# Altium PCB load-cal-board-1point2in.PcbDoc
Units mm, origin at the board's own origin, x right, y up, seen from the top; angles counter-clockwise.
Board outline 37 x 16 mm, 4 copper layers (Top Layer, Mid-Layer 1, Mid-Layer 2, Bottom Layer), stack 1.105 mm thick; 4 components, 3 nets, 14 pads, 150 vias.
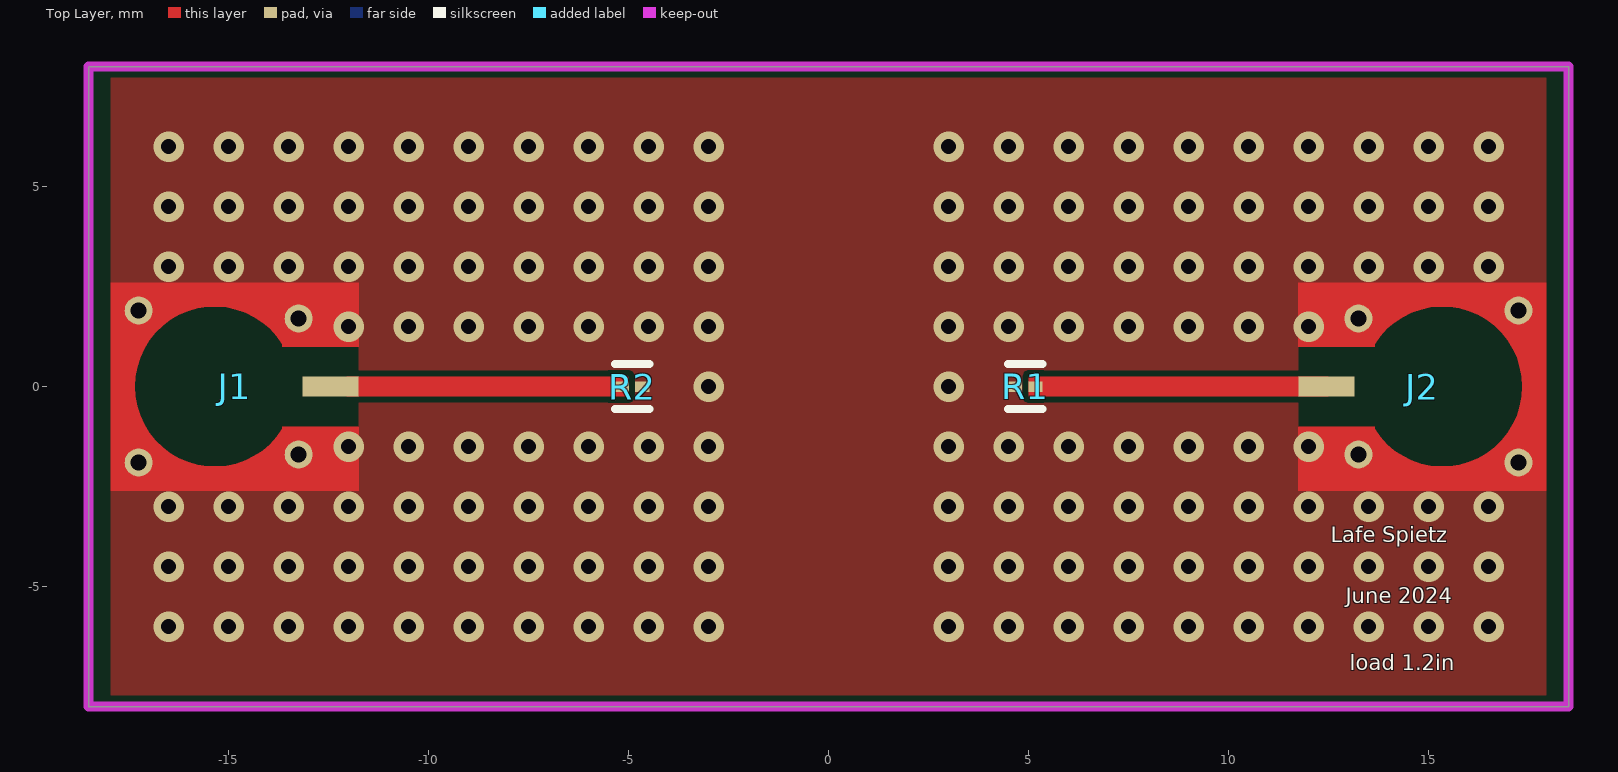
[diagram p0: Top Layer view]
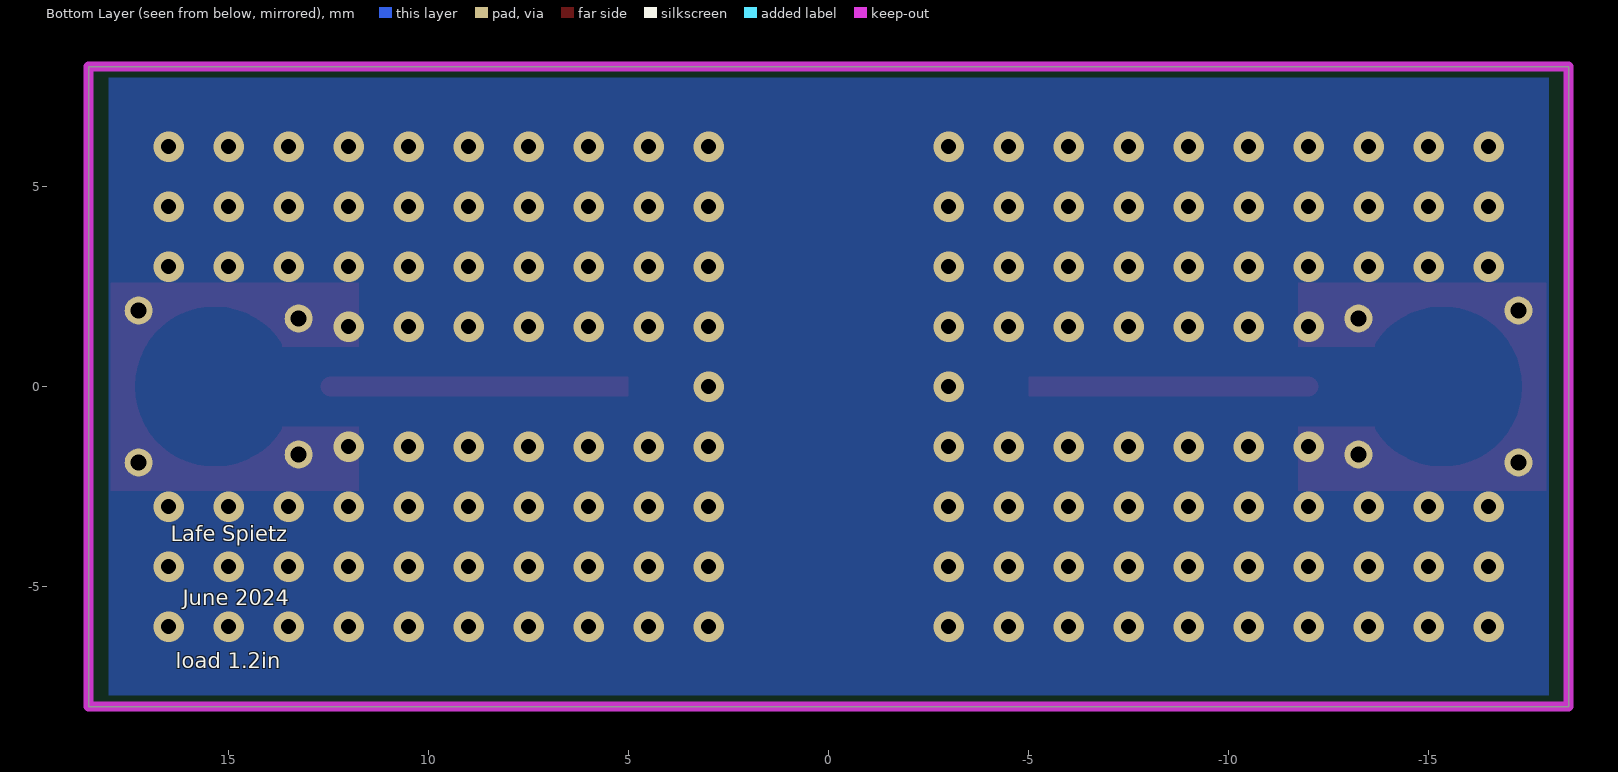
[diagram p1: Bottom Layer view, seen from below]
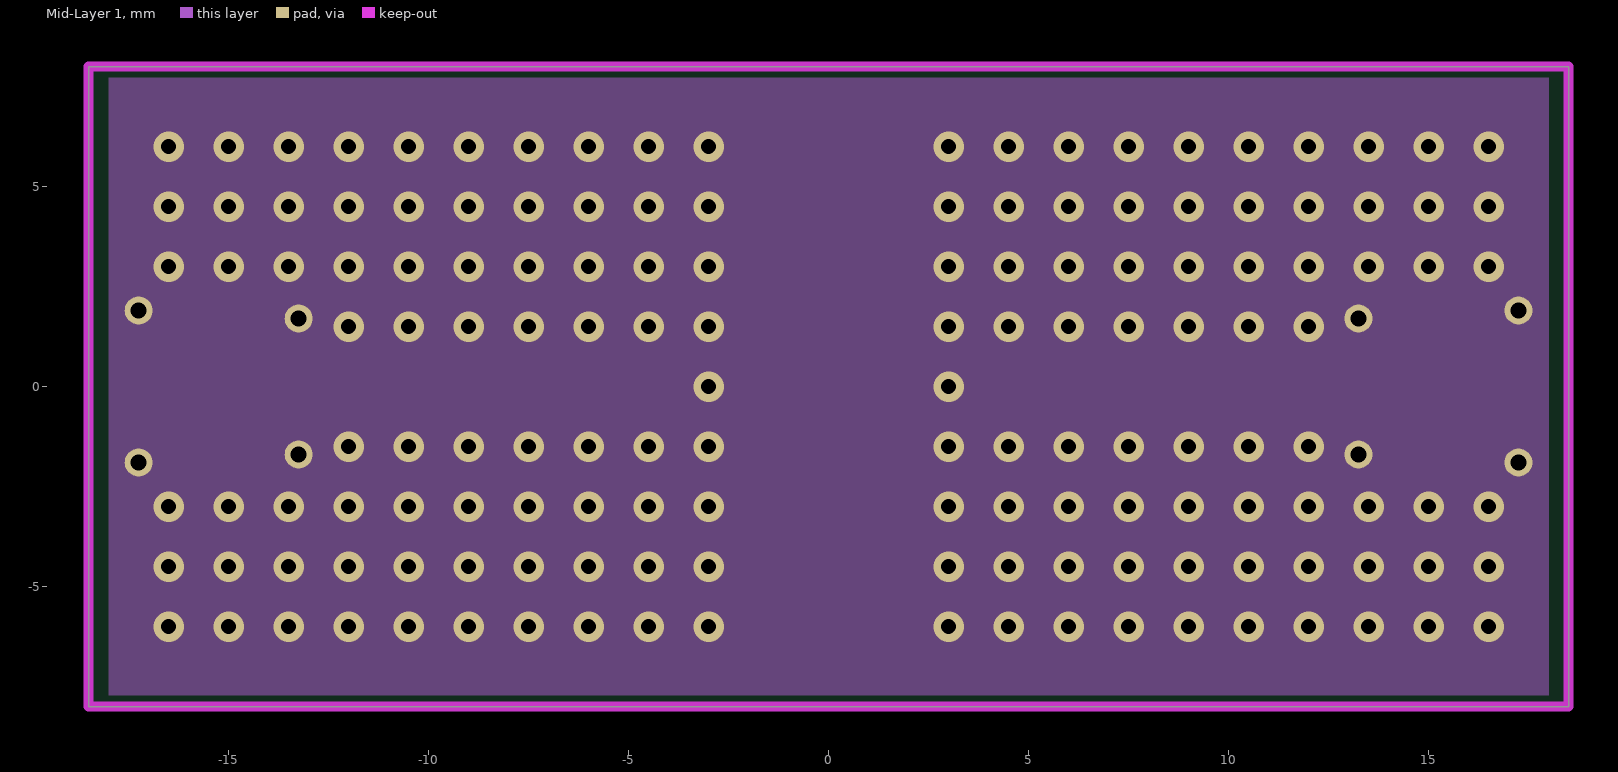
[diagram p2: Mid-Layer 1]
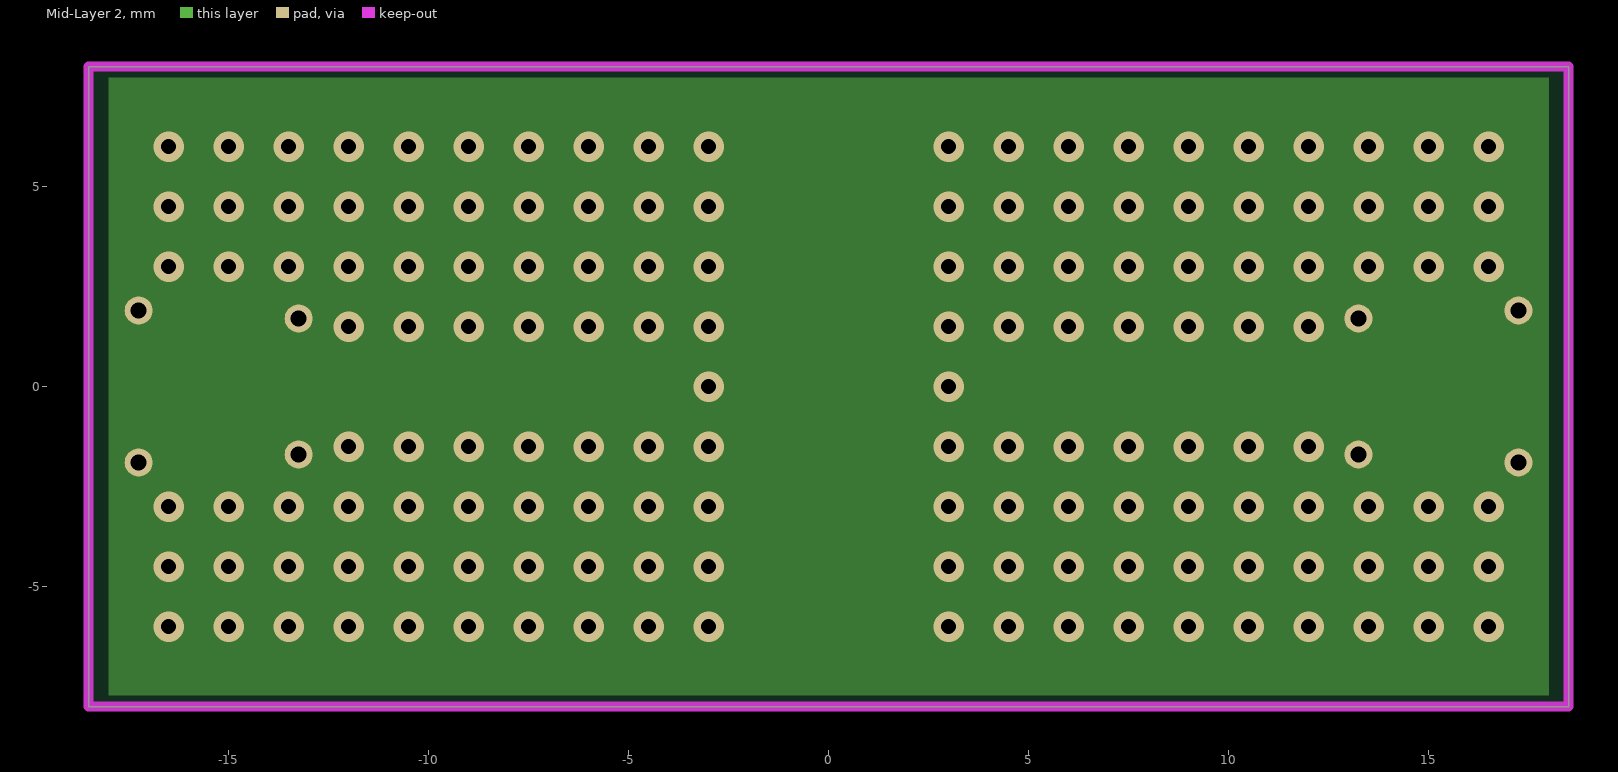
[diagram p3: Mid-Layer 2]
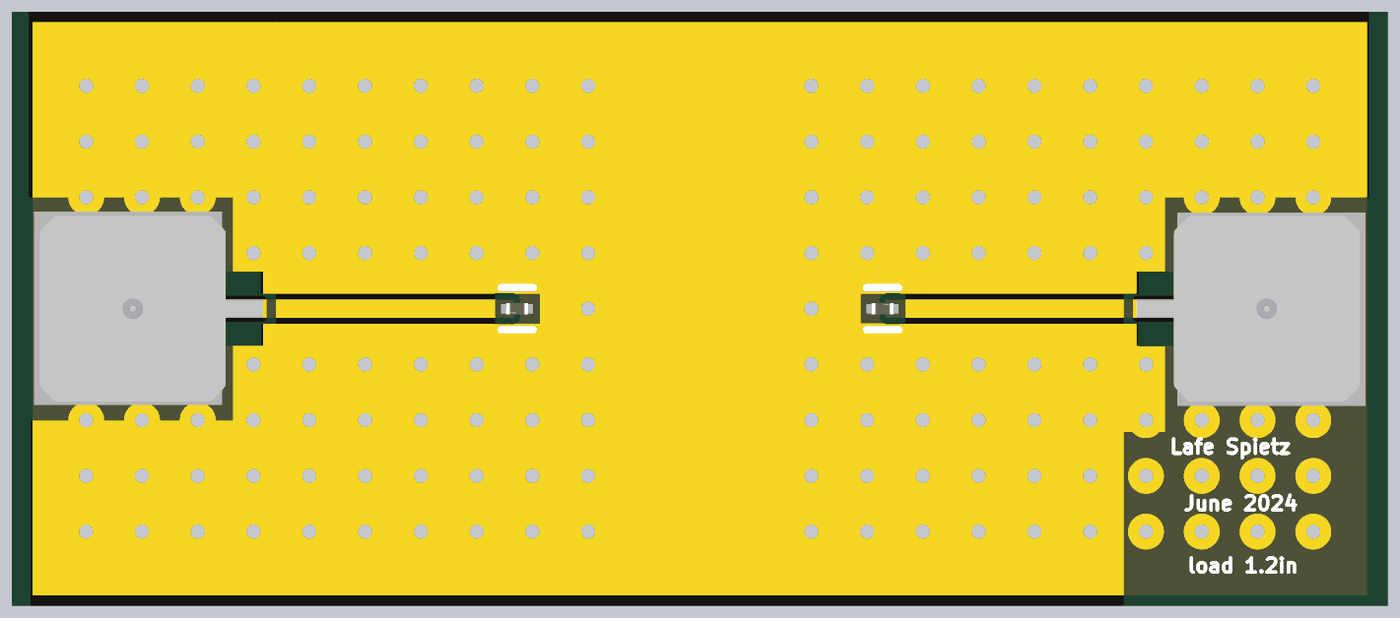
[diagram p4: 3D render of the assembled board from above, using the file's embedded part models]

## Layer stack, top to bottom
Top Solder: solder mask 0.0254, SM-001, Dk 4
Top Layer: signal copper 0.035
Core1: dielectric 0.254, RO4350B, Dk 3.48
Mid-Layer 1: signal copper 0.035
Dielectric 1: prepreg 0.1778, PR7628, Dk 4.24
Dielectric 2: prepreg 0.1016, PR2116, Dk 4.17
Dielectric 3: prepreg 0.1778, PR7628, Dk 4.24
Mid-Layer 2: signal copper 0.035
Core2: dielectric 0.254, RO-4350B, Dk 3.48
Bottom Layer: signal copper 0.035
Bottom Solder: solder mask 0.0254, SM-001, Dk 4

## Board outline
-18.5,-8 -18.5,8 18.5,8 18.5,-8

## Design rules (kind name [scope] priority, off if disabled: settings)
Clearance [All] p1: gap=0.254 ignorepadtopadclearanceinfootprint=FALSE except(0: Track-Fill Track-Region Poly-Poly Poly-Region Poly-Hole; 0.095: SMDPad-Region Region-Region; 0.1: Track-Track Track-SMDPad Via-Poly; 0.152: Arc-Poly Track-Poly SMDPad-Poly THPad-Poly Fill-Poly; 0.203: Arc-SMDPad; 0.229: SMDPad-SMDPad)
PolygonConnect [All] p1: connectstyle=Direct reliefconductorwidth=0.254 reliefentries=4 polygonreliefangle="90 Angle" airgapwidth=0.254
RoutingVias [All] p1: holewidth=0.381 width=0.635 viastyle="Through Hole" minholewidth=0.127 minwidth=0.254 maxholewidth=0.711 maxwidth=1.27
SolderMaskExpansion [All] p1: expansion=0.102 istentingtop=FALSE
Width [All] p1 off: maxlimit=0.55 minlimit=0.1 preferedwidth=0.254 toplayer_prefwidth=0.1 midlayer1_minwidth=0.254 midlayer1_maxwidth=0.254 midlayer2_minwidth=0.254 midlayer2_maxwidth=0.254 bottomlayer_minwidth=0.254 bottomlayer_maxwidth=0.254 minimp=50.000000 maximp=50.000000 favimp=50.000000
Width cpw-Z-1 [All] p2 off: maxlimit=0.5 minlimit=0.174 preferedwidth=0.254 toplayer_minwidth=0.323 toplayer_prefwidth=0.406 impedanceprofiledriven=TRUE impedanceprofileid={FF6547F1-1ACB-4B88-A69B-03F59FE56022} minimp=50.000000 maximp=50.000000 favimp=50.000000
30 further rules are at their usual default settings.

## Components (designator, comment, footprint, x,y, rotation, side; value= is the part's Value field where it differs from the comment)
J1 "SMP-straight-19S141-40ML5" rosenberger-19S141-40ML5 -15.347,0 r90 top
J2 "SMP-straight-19S141-40ML5" rosenberger-19S141-40ML5 15.347,0 r270 top
R1 "ERJ-1GNF1001C" FP-ERJ1GN-IPC_C 4.919,0 r0 top
R2 "ERJ-1GNF1001C" FP-ERJ1GN-IPC_C -4.91,0 r180 top

## Footprints (in the part's own frame and the unit in brackets; to place one, negate y for a bottom-side part, rotate by r counter-clockwise, add the part's x,y. Pads: shape width x height; smd on the part's side, far side on the other; paste and mask are expansions set on the pad)
FP-ERJ1GN-IPC_C [mm]
  rect 0.354x0.263 smd paste+0 mask+0: 1(-0.254,0) 2(0.254,0)
  silkscreen extent -0.43,-0.57 0.43,0.57, body extent -0.53,-0.27 0.53,0.27, height 0.25
rosenberger-19S141-40ML5 [mm]
  rect 0.5x1.4 smd: 1(0,-2.9)
  round 0.7 hole 0.4 mask+0: gnd(-1.9,1.9) gnd(-1.7,-2.1) gnd(1.7,-2.1) gnd(1.9,1.9)
  Top Layer region: -2.6,-3.6 -2.6,2.6 2.6,2.6 2.6,-3.6 1,-3.6 1,-1.696 1.06,-1.696 1.759,-0.951 2,0.042 1.718,1.024 0.988,1.739 0,2 -0.988,1.739 -1.718,1.024 -2,0.042 -1.759,-0.951 -1.06,-1.696 -1.06,-1.696 -1,-1.696 -1,-3.6
  body extent -2.5,-3.6 2.5,2.4, height 4.1

## Part data
J1 J2: "SMP Connector Plug, Male Pin 50Ohm Surface Mount Solder", Package=None, Supplier Part Number 1=476-19S201-40ML5, Availability="In Stock", Check_prices=https://www.snapeda.com/parts/853050232/Molex/view-part/?ref=eda, MF=Molex, MP=853050232, Price=None, Purchase-URL=https://pricing.snapeda.com/search/part/853050232/?ref=eda, SnapEDA_Link=https://www.snapeda.com/parts/853050232/Molex/view-part/?ref=snap, Supplier 1=Mouser
R1 R2: library part CMP-1010-00416-3, "RES SMD 1K OHM 1% 1/20W 0201", Case Code (Imperial)=0201, Case Code (Metric)=0603, Max Operating Temperature=125°C, Max Power Dissipation=50mW, Min Operating Temperature=-55°C, Package Quantity=15000, Resistance=1kR, Resistance Tolerance=1%, Resistor Type="Thick Film", Temperature Coefficient=200ppm/°C, Voltage Rating=25V, Case/Package=0201, Contact Plating=Tin, Features="Automotive AEC-Q200", Height=0.01inch, Lead Free="Lead Free", Length=0.6mm, Mount="Surface Mount", Number of Pins=2, Number of Terminations=2, Packaging="Tape and Reel", Power Rating=50mW, Radiation Hardening=No, RoHS Compliant=Yes, Series=ERJ, Size Code=0201, Termination=SMD/SMT, Tolerance=1%, Voltage Rating (DC)=25V, Weight=6E-06oz, Width=0.012inch

## Via types
v1: diameter 0.762, hole 0.381, Top Layer to Bottom Layer, 150 vias

## Nets (pads, with @x,y where several pads share a name; then routed paths per layer and width w, separated by ;. In a path a pad name is that pad's centre, name@x,y a point inside that pad or via, vN(x,y) a via of type N, cw(c..) or ccw(c..) an arc to the next point about the centre after c; other vN are vias at no path point)
GND: J1.gnd J2.gnd R1.1 R2.1
  other v1: -16.5,-6 -15,-6 -13.5,-6 -12,-6 -10.5,-6 -9,-6 -7.5,-6 -6,-6 -4.5,-6 -3,-6 3,-6 4.5,-6 6,-6 7.5,-6 9,-6 10.5,-6 12,-6 13.5,-6 15,-6 16.5,-6 -16.5,-4.5 -15,-4.5 -13.5,-4.5 -12,-4.5 -10.5,-4.5 -9,-4.5 -7.5,-4.5 -6,-4.5 -4.5,-4.5 -3,-4.5 3,-4.5 4.5,-4.5 6,-4.5 7.5,-4.5 9,-4.5 10.5,-4.5 12,-4.5 13.5,-4.5 15,-4.5 16.5,-4.5 -16.5,-3 -15,-3 -13.5,-3 -12,-3 -10.5,-3 -9,-3 -7.5,-3 -6,-3 -4.5,-3 -3,-3 3,-3 4.5,-3 6,-3 7.5,-3 9,-3 10.5,-3 12,-3 13.5,-3 15,-3 16.5,-3 -12,-1.5 -10.5,-1.5 -9,-1.5 -7.5,-1.5 -6,-1.5 -4.5,-1.5 -3,-1.5 3,-1.5 4.5,-1.5 6,-1.5 7.5,-1.5 9,-1.5 10.5,-1.5 12,-1.5 -3,0 3,0 -12,1.5 -10.5,1.5 -9,1.5 -7.5,1.5 -6,1.5 -4.5,1.5 -3,1.5 3,1.5 4.5,1.5 6,1.5 7.5,1.5 9,1.5 10.5,1.5 12,1.5 -16.5,3 -15,3 -13.5,3 -12,3 -10.5,3 -9,3 -7.5,3 -6,3 -4.5,3 -3,3 3,3 4.5,3 6,3 7.5,3 9,3 10.5,3 12,3 13.5,3 15,3 16.5,3 -16.5,4.5 -15,4.5 -13.5,4.5 -12,4.5 -10.5,4.5 -9,4.5 -7.5,4.5 -6,4.5 -4.5,4.5 -3,4.5 3,4.5 4.5,4.5 6,4.5 7.5,4.5 9,4.5 10.5,4.5 12,4.5 13.5,4.5 15,4.5 16.5,4.5 -16.5,6 -15,6 -13.5,6 -12,6 -10.5,6 -9,6 -7.5,6 -6,6 -4.5,6 -3,6 3,6 4.5,6 6,6 7.5,6 9,6 10.5,6 12,6 13.5,6 15,6 16.5,6
NetJ1_1: J1.1 R2.2 | length 6.5
  Top Layer w0.495: J1.1@-12,0 -5.5,0
NetJ2_1: J2.1 R1.2 | length 7.2
  Top Layer w0.495: R1.2@5.25,0 J2.1

## Polygon pours and split planes (outlines as drawn)
GND on Top Layer "NONET_L02_P-001" (solid, pour order 9): 17.947,8 11.453,8 11.453,2.46 17.947,2.46
GND on Top Layer "NONET_L02_P-001" (solid, pour order 8): 17.947,-2.6 11.747,-2.6 11.747,-8 17.947,-8 17.947,-7.715
GND on Top Layer "NONET_L02_P-001" (solid, pour order 7): -11.299,8 -17.947,8 -17.947,2.6 -11.299,2.6 -11.299,2.635
GND on Top Layer "NONET_L02_P-001" (solid, pour order 6): -11,-2.442 -17.947,-2.442 -17.947,-8 -11,-8 -11,-7.558
GND on Top Layer "GND_L01_P000" (solid, pour order 0): -11.747,-8 6,-8 6,8 -11.747,8
GND on Top Layer "GND_L01_P005" (solid, pour order 5): 5,-8 11.747,-8 11.747,8 5,8
GND on Mid-Layer 1 "GND_L02_P001" (solid, pour order 1): -18,8 18,8 18,-8 -18,-8
GND on Mid-Layer 2 "GND_L03_P002" (solid, pour order 2): -18,8 18,8 18,-8 -18,-8
GND on Bottom Layer "GND_L04_P003" (solid, pour order 3): -18,8 18,8 18,-8 -18,-8
no net on Top Solder "NONET_L02_P-001" (solid): 11.3,-1.012 12.508,-1.012 12.508,-3.325 11.3,-3.325
no net on Top Solder "NONET_L02_P-001" (solid): -18,-3.012 -12.35,-3.012 -12.35,-8 -18,-8
no net on Top Solder "NONET_L02_P-001" (solid): -18.05,7.988 -12.55,7.988 -12.55,3 -18.05,3
no net on Top Solder "NONET_L02_P-001" (solid): 12.5,7.988 18,7.988 18,3 12.5,3
no net on Top Solder "NONET_L02_P-001" (solid): 11.087,8 12.509,8 12.509,0.993 11.087,0.993
no net on Top Solder "NONET_L02_P-001" (solid): 10.386,2.601 11.809,2.601 11.809,0.399 10.386,0.399
no net on Top Solder "NONET_L02_P-001" (solid): 10.374,-0.398 11.796,-0.398 11.796,-2.59 10.374,-2.59
no net on Top Solder "NONET_L02_P-001" (solid): -11.81,2.018 -10.52,2.018 -10.52,0.408 -11.81,0.408
no net on Top Solder "NONET_L02_P-001" (solid): -11.797,-0.405 -10.507,-0.405 -10.507,-2.015 -11.797,-2.015
no net on Top Solder "NONET_L02_P-001" (solid): -11.4,8 -11.4,-8 11.4,-8 11.4,8
no net on Top Solder "NONET_L02_P-001" (solid): -12.556,8 -11.244,8 -11.244,1 -12.556,1
no net on Top Solder "NONET_L02_P-001" (solid): -12.545,-1 -11.255,-1 -11.255,-7.997 -12.545,-7.997
no net on Bottom Solder "NONET_L02_P-001" (solid): 18,8 -18,8 -18,-8 18,-8

## Keep-outs
Keep-Out Layer:
  lines w0.254: -18.5,-8 7,-8 18.5,-8 18.5,8 -18.5,8 -18.5,-8

## Other copper
Top Layer:
  rectangle net NetJ2_1: 5.003,-0.249 5.379,0.248
  rectangle net NetJ1_1: -5.5,-0.25 -5,0.25

## Silkscreen, mask and mechanical layers (free items; w line width, h text height)
Top Overlay:
  text "Lafe Spietz" at 12.552,-3.896 h0.38
  text "June 2024" at 12.927,-5.423 h0.38
  text "load 1.2in" at 13.027,-7.098 h0.38
Bottom Overlay:
  text "Lafe Spietz" at 16.448,-3.871 h0.38
  text "June 2024" at 16.148,-5.473 h0.38
  text "load 1.2in" at 16.323,-7.048 h0.38
Top Solder:
  pour cut-out: 4.332,0.404 5.532,0.404 5.532,-0.396 4.332,-0.396
  pour cut-out: -5.5,0.4 -4.3,0.4 -4.3,-0.4 -5.5,-0.4
Bottom Solder:
  pour cut-out: 18.5,-8 18.5,-3.25 12.25,-3.25 12.25,-8